# Altium PCB testTrans.PcbDoc
Units mm, origin at the board's own origin, x right, y up, seen from the top; angles counter-clockwise.
Board outline 85.47 x 79.88 mm, 2 copper layers (Top Layer, Bottom Layer); 36 components, 22 nets, 103 pads, 0 vias.
Unrouted connection lines stored in the file: 1.
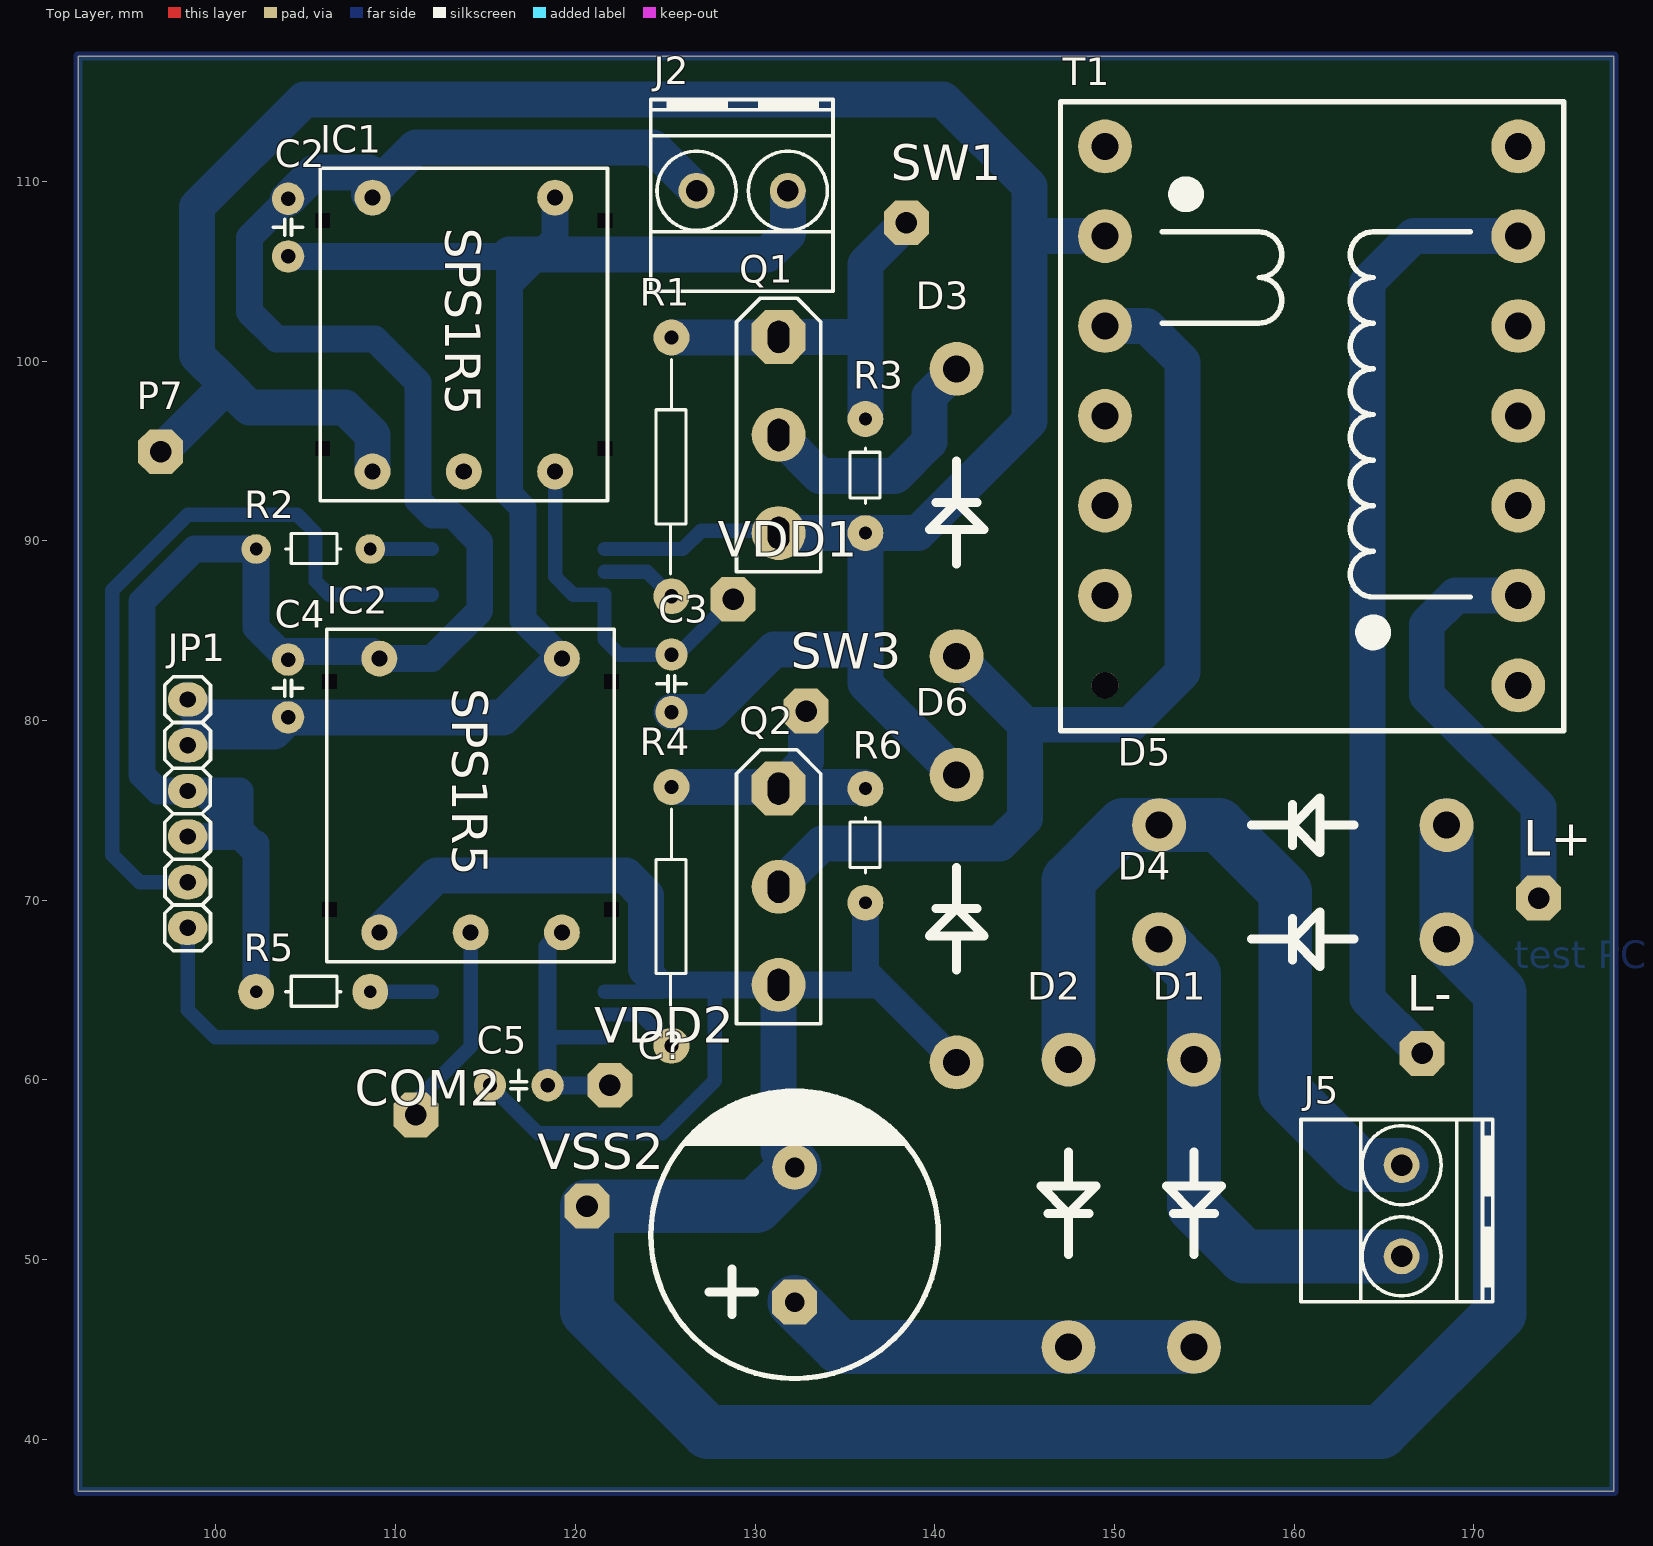
[diagram p0: Top Layer view]
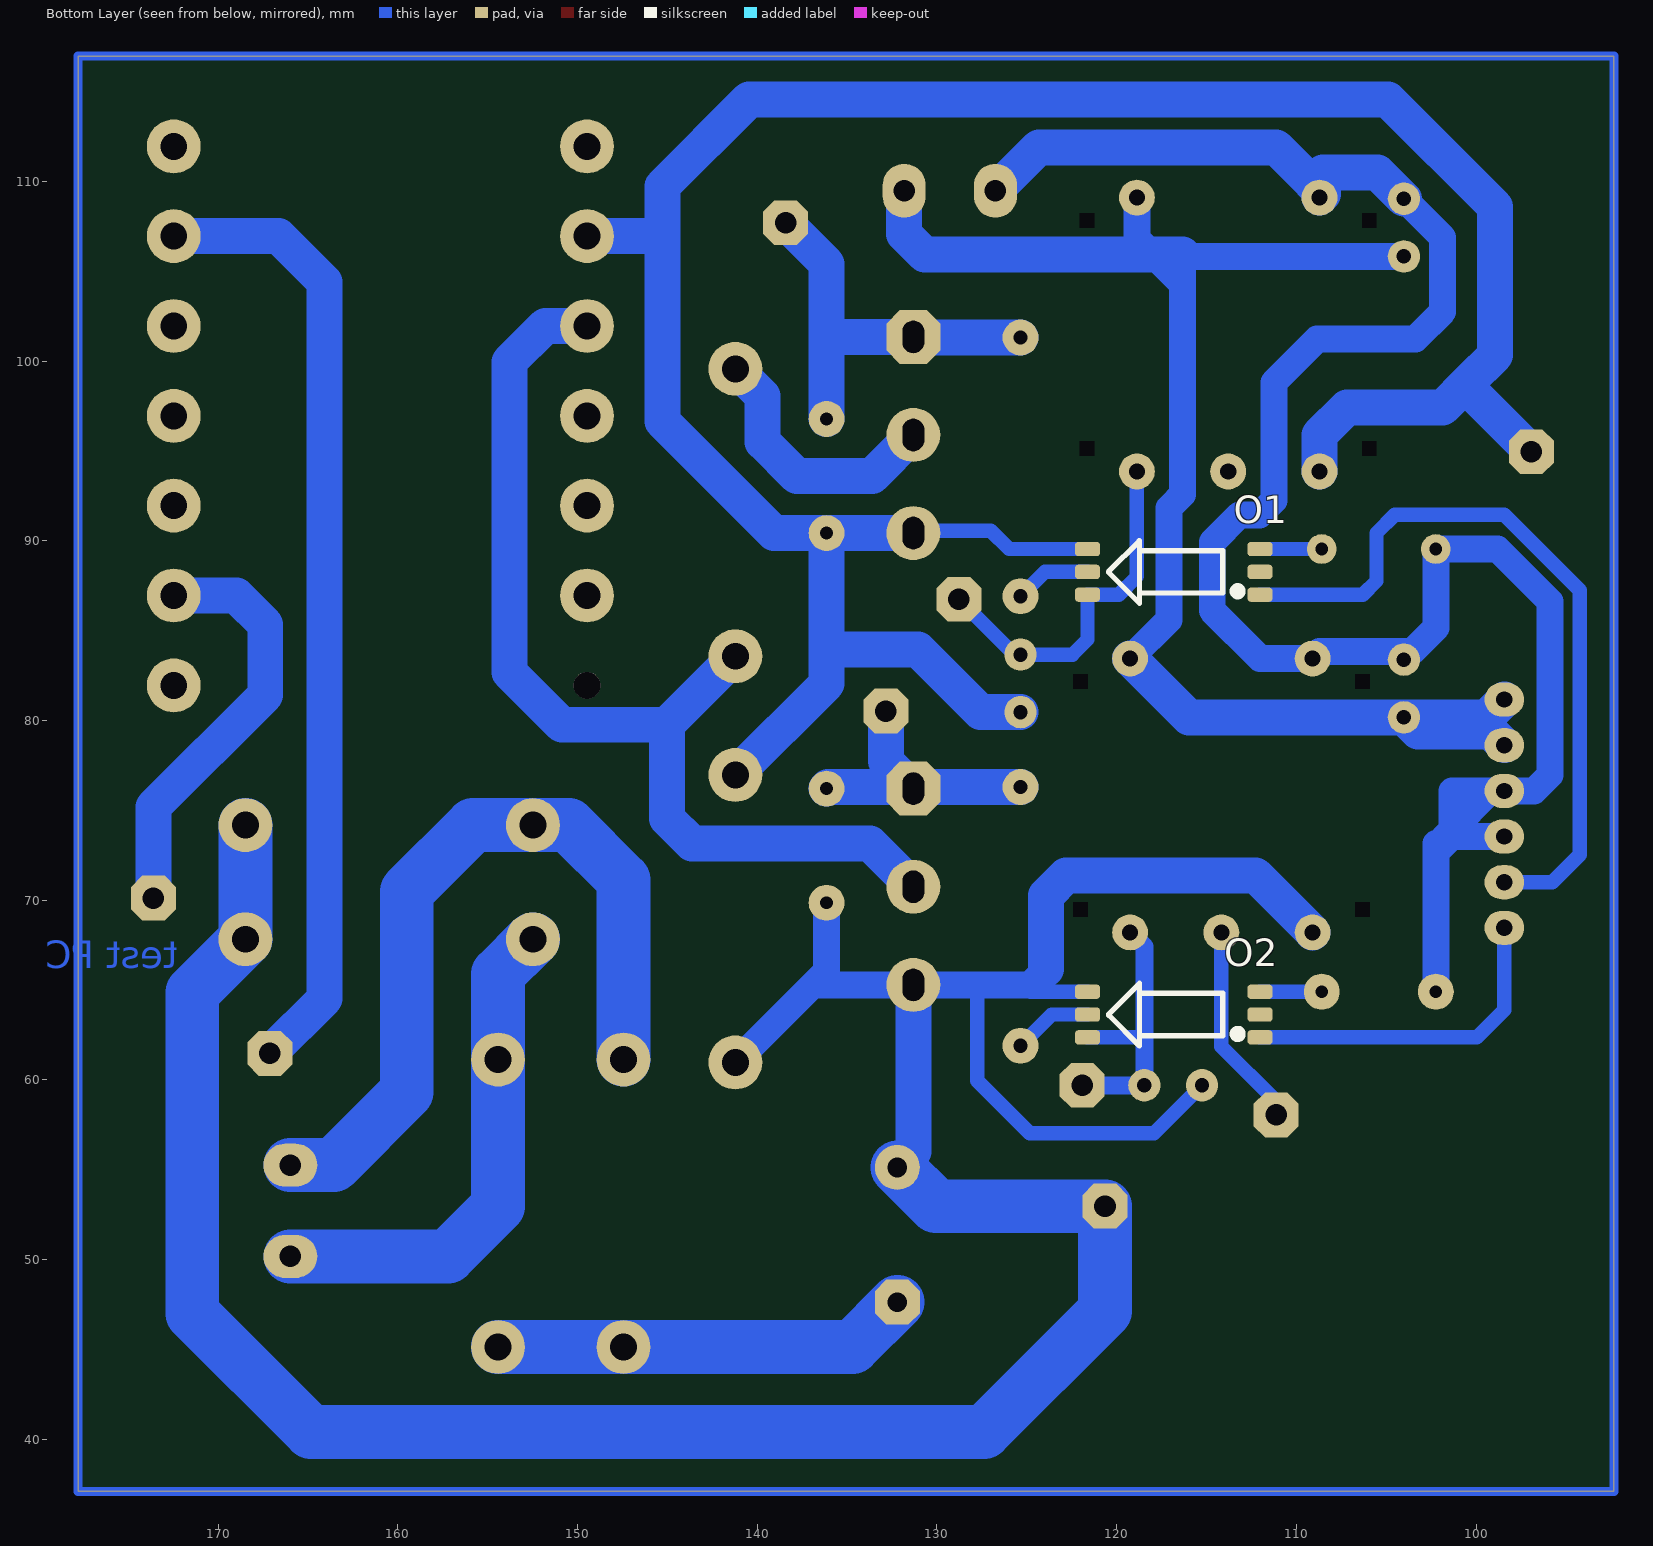
[diagram p1: Bottom Layer view, seen from below]
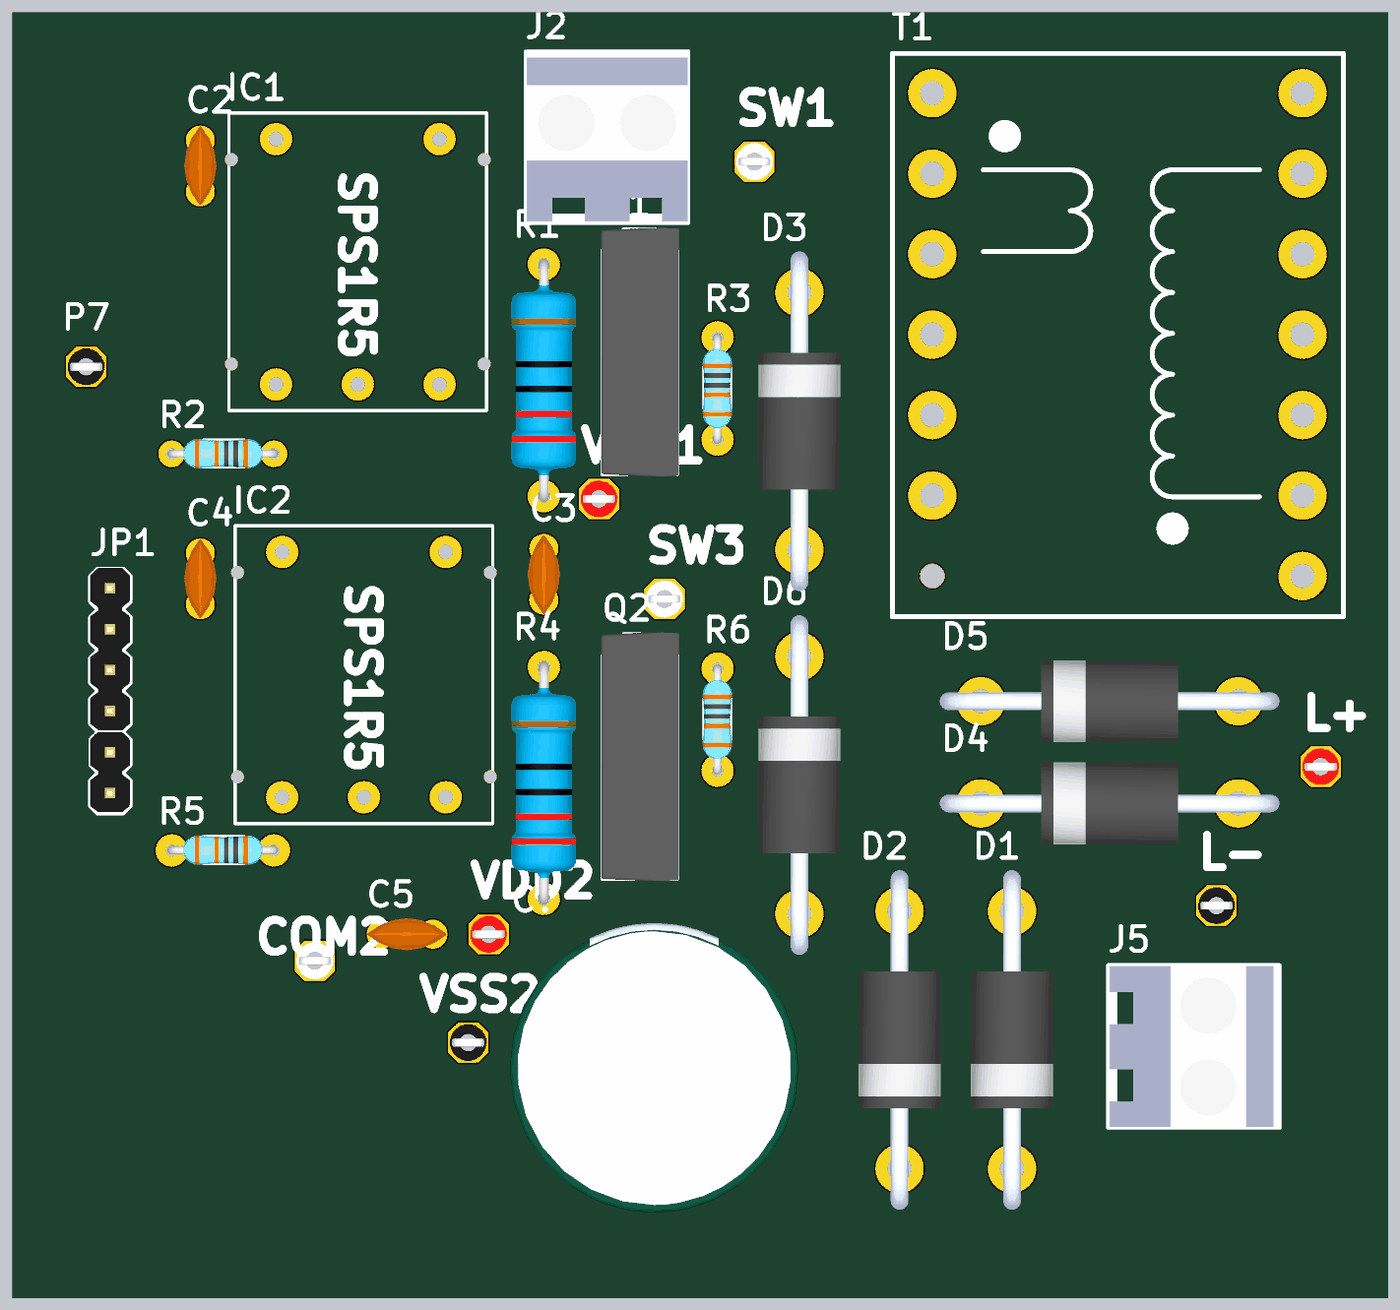
[diagram p2: 3D render of the assembled board from above, using the file's embedded part models]

## Layer stack, top to bottom
Top Solder: solder mask 0.0102, Solder Resist, Dk 3.5
Top Layer: signal copper 0.0356
Dielectric 1: dielectric 0.32, FR-4, Dk 4.8
Bottom Layer: signal copper 0.0356
Bottom Solder: solder mask 0.0102, Solder Resist, Dk 3.5

## Board outline
92.329,37.084 177.8,37.084 177.8,116.967 92.329,116.967

## Design rules (kind name [scope] priority, off if disabled: settings)
Clearance [All] p1: gap=0.254 ignorepadtopadclearanceinfootprint=FALSE except(0: Arc-Hole Track-Hole SMDPad-Hole THPad-Hole Via-Hole Fill-Hole Poly-Hole Region-Hole Text-Hole)
PolygonConnect [All] p1: connectstyle=Relief reliefconductorwidth=0.254 reliefentries=4 polygonreliefangle="90 Angle" airgapwidth=0.254
RoutingVias [All] p1: holewidth=0.711 width=1.27 viastyle="Through Hole" minholewidth=0.711 minwidth=1.27 maxholewidth=0.711 maxwidth=1.27
SolderMaskExpansion [All] p1: expansion=0.102 istentingtop=FALSE
Width [All] p1: maxlimit=3 minlimit=0.7 preferedwidth=1
30 further rules are at their usual default settings.

## Components (designator, comment, footprint, x,y, rotation, side; value= is the part's Value field where it differs from the comment)
C2 "104" "CAP 104" 104.013,107.442 r270 top value=0,047uF
C3 "104" "CAP 104" 125.349,82.042 r90 top value=0,047uF
C4 "104" "CAP 104" 104.013,81.788 r270 top value=0,047uF
C5 "104" "CAP 104" 116.84,59.69 r0 top value=0,047uF
C? "100uF 400V" "CAP DxL 18x30" 132.207,51.368 r90 top
COM2 "test PCB" tp_white_1p 111.125,58.039 r0 top (schematic designator P4)
D1 "DIODE DIP" "DIODE DO-201AD" 154.432,53.122 r270 top value=1N4007
D2 "DIODE DIP" "DIODE DO-201AD" 147.447,53.122 r270 top value=1N4007
D3 "DIODE DIP" "DIODE DO-201AD" 141.224,91.567 r90 top value=HER506
D4 "DIODE DIP" "DIODE DO-201AD" 160.492,67.818 r180 top value=1N4007
D5 "DIODE DIP" "DIODE DO-201AD" 160.492,74.168 r180 top value=1N4007
D6 "DIODE DIP" "DIODE DO-201AD" 141.224,68.961 r90 top value=HER506
IC1 "SPD1R5-5-1515" SPS1R5 105.792,110.723 r270 top
IC2 "SPD1R5-5-1515" SPS1R5 106.173,85.069 r270 top
J2 "CONN_TB2" TBG_2 129.286,109.474 r0 top
J5 "CONN_TB2" TBG_2 165.989,52.705 r270 top
JP1 "JP6 PIN" JP_6PIN 98.425,81.153 r270 top value=JP7
L+ "test PCB" tp_red_1p 173.609,70.104 r0 top (schematic designator P1)
L- "test PCB" Tp_black_1p 167.132,61.468 r0 top (schematic designator P2)
O1 "TLP5754" TLP5754 116.821,88.265 r0 bottom
O2 "TLP5754" TLP5754 116.821,63.627 r0 bottom
P7 "test PCB" Tp_black_1p 96.922,94.949 r0 top
Q1 "IRFP460" TO-247 131.318,101.344 r270 top
Q2 "IRFP460" TO-247 131.318,76.199 r270 top
R1 "8R2" R-1W 125.349,94.107 r90 top value="R1/4W - 1K"
R2 "150R" R1/8W#1 105.41,89.535 r0 top value="R1/4W - 1K"
R3 "10K" R1/8W#2 136.144,93.599 r90 top value="R1/4W - 1K"
R4 "8R2" R-1W 125.349,69.088 r90 top value="R1/4W - 1K"
R5 "150R" R1/8W#2 105.41,64.897 r0 top value="R1/4W - 1K"
R6 "10K" R1/8W#2 136.144,73.025 r90 top value="R1/4W - 1K"
SW1 "test PCB" tp_white_1p 138.43,107.696 r0 top (schematic designator P6)
SW3 "test PCB" tp_white_1p 132.842,80.518 r0 top (schematic designator P9)
T1 "EER35" "Pulse Transformer" 149.479,111.948 r270 top
VDD1 "test PCB" tp_red_1p 128.778,86.741 r0 top (schematic designator P5)
VDD2 "test PCB" tp_red_1p 121.92,59.69 r0 top (schematic designator P8)
VSS2 "test PCB" Tp_black_1p 120.65,52.959 r0 top (schematic designator P10)

## Footprints (in the part's own frame and the unit in brackets; to place one, negate y for a bottom-side part, rotate by r counter-clockwise, add the part's x,y. Pads: shape width x height; smd on the part's side, far side on the other; paste and mask are expansions set on the pad)
"CAP 104" [mm] "Capacitor, Electrolytic, Radial; Body 5 x 11 mm (Dia.xH typ); Pin Spacing 2 mm (typ)"
  round 1.8 hole 0.8: 1(-1.587,0) 2(1.619,0)
  silkscreen extent -0.44,-0.83 0.44,0.83, body extent -2.46,-1 2.46,1, height 6.46
"CAP DxL 18x30" [mm] "100uF 400V"
  oct 2.5x2.5 hole 1.1: 1(-3.75,0)
  round 2.5 hole 1.1: 2(3.75,0)
  silkscreen extent -8,-8 8,8, body extent -9,-9 9.01,9, height 30.51
"DIODE DO-201AD" [mm] "DIODE DO-201AD"
  round 3 hole 1.5: 1(-8,0) 2(8,0)
  silkscreen extent -2.86,-1.52 2.86,1.52, body extent -10.55,-2.55 10.55,2.55, height 7.55
JP_6PIN [mm] "JP_6PIN"
  oval 1.9x2.2 hole 0.9: 1(0,0) 2(2.54,0) 3(5.08,0) 4(7.62,0) 5(10.16,0) 6(12.7,0)
  silkscreen extent -1.27,-1.27 13.98,1.27, body extent -1.3,-1.27 13.87,1.23, height 8.22
"Pulse Transformer" [mm] "Pulse Transformer"
  round 3 hole 1.5: 1(0,0) 2(5,0) 3(10,0) 4(15,0) 5(20,0) 6(25,0) 8(30,23) 9(25,23) 10(20,23) 11(15,23) 12(10,23) 13(5,23) 14(0,23)
  round 1.5 hole 1.5: 7(30,0)
  silkscreen extent -2.48,-2.48 32.52,25.52
R1/8W#1 [mil] "R 1/8W, 2 pin, 300mil"
  round 65 hole 28: 1(-125,0) 2(125,0)
  silkscreen extent -60,-32 61,34, body extent -135,-35 135,37, height 86
R1/8W#2 [mil] "R 1/8W, 2 pin, 300mil"
  round 78.74 hole 28: 1(-125,0) 2(125,0)
  silkscreen extent -60,-32 61,34, body extent -135,-35 135,37, height 86
R-1W [mm] "R-1W"
  round 2 hole 0.8: 1(-7.2,0) 2(7.2,0)
  silkscreen extent -5.97,-0.81 5.97,0.86, body extent -7.55,-2.02 7.55,2.02, height 5.02
SPS1R5 [mm] "SPS1R5"
  round 2 hole 0.9: 1(1.63,13.08) 2(1.63,2.92) 3(16.87,2.92) 4(16.87,8) 5(16.87,13.08)
  round 0 hole 0.8 square: ""(2.9,15.85) ""(2.9,0.15) ""(15.6,15.85) ""(15.6,0.15)
  silkscreen extent 0,0 18.5,16
TBG_2 [mm] "Terminal Block Green"
  round 2 / inner round 2 / far side oval 2.4x3 hole 1.2: 1(-2.54,0) 2(2.54,0)
  silkscreen extent -5.08,-5.6 5.05,5.08, body extent -5,-5.5 5,5, height 14
TLP5754 [mm] "TLP5754"
  rrect50% 1.4x0.8 smd: 1(-4.8,1.27) 2(-4.8,0) 3(-4.8,-1.27) 4(4.8,-1.27) 5(4.8,0) 6(4.8,1.27)
  silkscreen extent -3.76,-1.75 3.63,1.75, body extent -5,-1.92 5,1.92, height 2.2
TO-247 [mm]
  oct 3x3 hole 1.2 slot 1.8 at 0 deg: 1(0,0)
  round 3 hole 1.2 slot 1.8 at 0 deg: 2(5.46,0) 3(10.92,0)
  silkscreen extent -2.16,-2.35 13.08,2.35, body extent -2.24,-2.43 13.21,2.43, height 24.3
Tp_black_1p [mm]
  oct 2.5x2.5 hole 1.2: 1(0,0)
  body extent -1.15,-1.15 1.15,1.15, height 5
tp_red_1p [mm]
  oct 2.5x2.5 hole 1.2: 1(0,0)
  body extent -1.15,-1.15 1.15,1.15, height 5
tp_white_1p [mm]
  oct 2.5x2.5 hole 1.2: 1(0,0)
  body extent -1.15,-1.15 1.15,1.15, height 5

## Part data
C2 C3 C4 C5: library part "CAP Keo", "CAP Keo", Copyright=VanDungEvn
C?: library part "CAP DIP", "CAP DIP"
COM2 L+ L- P7 SW1 SW3 VDD1 VDD2 VSS2: "testpin"
IC1 IC2: "Power supply Driver SPD1R5-5-1515 / Efficiency 80% / Input 0.381A / Output 50mA"
J2 J5: "CONN, TERMINAL BLOCK, 5.08mm pitch"
JP1: library part JP6
O1 O2: Package="DIP-8 Toshiba", Availability="In Stock", Check_prices=https://www.snapeda.com/parts/TLP250/Toshiba+Semiconductor+and+Storage/view-part/?ref=eda, MF="Toshiba Semiconductor", MP=TLP250, PRICE=None, Purchase-URL=https://pricing.snapeda.com/search/part/TLP250/?ref=eda, SnapEDA_Link=https://www.snapeda.com/parts/TLP250/Toshiba+Semiconductor+and+Storage/view-part/?ref=snap
Q1 Q2: library part "MOSFET IRFP460", "MOSFET N-Channel 500 V 20A (Tc) 280W (Tc) Through Hole TO-247AC", Package="TO-247 Vishay Siliconix", Availability="In Stock", Check_prices=https://www.snapeda.com/parts/IRFP460/Vishay+Siliconix/view-part/?ref=eda, MF="Vishay Siliconix", MP=IRFP460, PRICE=None, Purchase-URL=https://pricing.snapeda.com/search/part/IRFP460/?ref=eda, SnapEDA_Link=https://www.snapeda.com/parts/IRFP460/Vishay+Siliconix/view-part/?ref=snap
R1 R2 R3 R4 R5 R6: library part "RES DIP", "RES DIP"
T1: library part "Pulse Transformer", "Pulse Transformer"
D1 D2 D3 D4 D5 D6: ASSEMBLY=ASSEMBLY, DESC=DESCRIPTION, MANF=Kingtronics, MANF_P#=M7, PARAM="1000V VRRM", PARAM2=1A, PRICE=PRICE

## Nets (pads, with @x,y where several pads share a name; then routed paths per layer and width w, separated by ;. In a path a pad name is that pad's centre, name@x,y a point inside that pad or via, vN(x,y) a via of type N, cw(c..) or ccw(c..) an arc to the next point about the centre after c; other vN are vias at no path point)
+5: C2.2 C4.2 IC1.1 IC2.1 J2.2 JP1.1 JP1.2 | length 88.4
  Bottom Layer w1.5: C2.2 115.602,105.823 ; 116.332,105.918 116.332,104.267 ; IC1.1 118.872,106.807 116.332,104.267 ; IC2.1 117.094,85.598 117.094,91.821 116.332,92.583 116.332,104.267
  Bottom Layer w2: JP1.2 99.187,79.375 103.219,79.375 C4.2 ; JP1.1 99.409,80.169 C4.2 ; 116.332,105.918 130.683,105.918 131.826,107.061 J2.2 ; IC2.1 115.983,80.169 C4.2
COM1: IC1.4
COM2: COM2.1 IC2.4 | length 11.4
  Bottom Layer w0.8: COM2.1 111.125,58.801 114.173,61.849 IC2.4
GND: C2.1 C4.1 IC1.2 IC2.2 J2.1 JP1.3 JP1.4 R2.1 R5.1 | length 120.2
  Bottom Layer w1.5: JP1.4 101.346,73.533 ; 101.727,73.533 101.346,73.914 ; R5.1 102.235,73.152 101.981,72.898 101.346,73.533 ; C2.1 101.854,106.87 101.854,102.743 103.378,101.219 108.839,101.219 111.252,98.806 111.252,92.234 112.046,91.44 113.157,91.44 114.681,89.916 114.681,86.106 112.014,83.439 IC2.2 108.712,83.82 103.569,83.82 102.235,85.153 R2.1 98.806,89.535 95.885,86.614 95.885,76.962 96.774,76.073 JP1.3 JP1.3@99.187,76.073 ; JP1.3@99.187,76.073 101.346,76.073 101.346,73.914 ; JP1.3@99.187,76.073 101.346,73.914 ; 101.346,73.533 101.346,73.914
  Bottom Layer w2: C2.1 105.474,110.49 108.521,110.49 108.521,109.283 IC1.2 108.712,109.474 109.125,109.887 111.125,111.887 124.333,111.887 J2.1
GNP: C5.1 C?.2 D4.1 D5.1 D6.1 IC2.3 O2.4 Q2.3 R6.1 VSS2.1 | length 182.1
  Bottom Layer w0.8: C5.1 117.919,57.023 124.841,57.023 127.762,59.944 127.762,65.024 127.507,65.279 ; O2.4 124.818,64.897
  Bottom Layer w1.5: 123.93,66.167 124.818,65.279 127.507,65.279 Q2.3 136.906,65.279 ; R6.1 136.144,66.041 136.906,65.279 ; D6.1 136.906,65.279
  Bottom Layer w2: IC2.3 112.268,71.374 122.809,71.374 123.93,70.253 123.93,66.167 ; Q2.3 131.318,56.007 C?.2
  Bottom Layer w3: C?.2 130.048,52.959 VSS2.1 120.65,47.117 127.381,40.386 164.846,40.386 171.45,46.99 171.45,64.86 D4.1 D5.1
NetC?_1: C?.1 D1.2 D2.2 D3.2 Q1.2 | length 38.1
  Bottom Layer w2: Q1.2 133.603,93.599 137.795,93.599 139.7,95.504 139.7,98.043 D3.2
  Bottom Layer w3: C?.1 134.703,45.122 D2.2 D1.2
NetD1_1: D1.1 D4.2 J5.2 | length 28.4
  Bottom Layer w3: D4.2 154.432,65.878 D1.1 154.432,52.959 157.226,50.165 J5.2
NetD2_1: D2.1 D5.2 J5.1 | length 44.2
  Bottom Layer w3: D2.1 147.447,71.12 150.495,74.168 D5.2 155.829,74.168 159.512,70.485 159.512,59.309 163.576,55.245 J5.1
NetD3_1: D3.1 Q2.2 T1.3 | length 58.3
  Bottom Layer w2: Q2.2 133.731,73.152 143.637,73.152 145.034,74.549 145.034,79.757 ; D3.1 145.034,79.757 ; T1.3 151.798,101.948 153.797,99.949 153.797,82.677 150.877,79.757 145.034,79.757
NetJP1_5: JP1.5 O1.1 | length 42.5
  Bottom Layer w0.8: JP1.5 95.758,70.993 94.234,72.517 94.234,87.249 98.425,91.44 104.521,91.44 105.537,90.424 105.537,87.757 106.299,86.995 O1.1
NetJP1_6: JP1.6 O2.1 | length 18.8
  Bottom Layer w0.8: JP1.6 98.425,63.881 99.949,62.357 O2.1
NetO1_3: O1.3 R2.2 | length 3.4
  Bottom Layer w0.8: R2.2 O1.3
NetO1_5: O1.5 R1.1 | length 4.3
  Bottom Layer w0.8: O1.5 123.991,88.265 R1.1
NetO2_3: O2.3 R5.2 | length 3.4
  Bottom Layer w0.8: R5.2 O2.3
NetO2_5: O2.5 R4.1 | length 4.4
  Bottom Layer w0.8: O2.5 123.61,63.627 R4.1
NetP1_1: L+.1 T1.9 | length 23.6
  Bottom Layer w2: T1.9 168.99,86.948 167.386,85.344 167.386,81.407 173.609,75.184 L+.1
NetP2_1: L-.1 T1.13 | length 53.6
  Bottom Layer w2: L-.1 164.084,64.516 164.084,104.394 166.638,106.948 T1.13
NetP6_1: Q1.1 R1.2 R3.2 SW1.1 | length 27.2
  Bottom Layer w2: R1.2 131.281,101.307 Q1.1 136.144,101.344 R3.2 136.144,105.41 SW1.1
NetP9_1: Q2.1 R4.2 R6.2 SW3.1 | length 15.8
  Bottom Layer w2: R4.2 Q2.1@131.407,76.288 ; Q2.1 Q2.1@131.407,76.288 ; SW3.1 132.842,77.723 Q2.1@131.407,76.288 ; R6.2 136.056,76.288 Q2.1@131.407,76.288
VDD1: C3.2 IC1.5 O1.6 VDD1.1 | length 20.3
  Bottom Layer w0.8: IC1.5 118.872,88.011 119.888,86.995 O1.6 121.621,84.5 122.46,83.661 C3.2 125.698,83.661 VDD1.1
VDD2: C5.2 IC2.5 O2.6 VDD2.1 | length 15.5
  Bottom Layer w0.8: 118.459,62.357 O2.6
  Bottom Layer w1: IC2.5 118.459,67.405 118.459,62.357 C5.2 VDD2.1
VSS1: C3.1 D6.2 IC1.3 O1.4 P7.1 Q1.3 R3.1 T1.2 | length 149.9
  Bottom Layer w0.8: O1.4 125.984,89.535 127,90.551 131.191,90.551 Q1.3
  Bottom Layer w2: P7.1 100.393,98.42 100.393,98.869 ; IC1.3 108.712,95.885 107.188,97.409 101.854,97.409 100.393,98.869 ; C3.1 127.572,80.454 131.064,83.947 136.144,83.947 ; Q1.3 R3.1 ; D6.2 136.144,82.041 R3.1 ; T1.2 145.288,106.948 ; 100.393,98.869 98.933,100.33 98.933,108.585 104.902,114.554 140.462,114.554 145.288,109.728 145.288,106.948 ; R3.1 139.065,90.424 145.288,96.647 145.288,106.948
pads on no net: IC1. IC2. O1.2 O2.2 T1.1 T1.4 T1.5 T1.6 T1.7 T1.8 T1.10 T1.11 T1.12 T1.14
copper on no net: | length 330.7
  Bottom Layer w0.5: 92.329,37.084 92.329,116.967 177.8,116.967 177.8,37.084 92.329,37.084

## Text inside footprints (layer, text, board x,y; h text height)
IC1: Top Overlay "SPS1R5" at 112.769,107.429 h2 r270
IC2: Top Overlay "SPS1R5" at 113.15,81.775 h2 r270